# Altium PCB PCB_3U_Tester.PCBDOC (part 1 of 2)
Units mm, origin at the board's own origin, x right, y up, seen from the top; angles counter-clockwise.
Board outline 63.4 x 100 mm, 4 copper layers (Top, MP(GND), L3, Bot), stack 0.905 mm thick; 74 components, 58 nets, 355 pads, 142 vias.
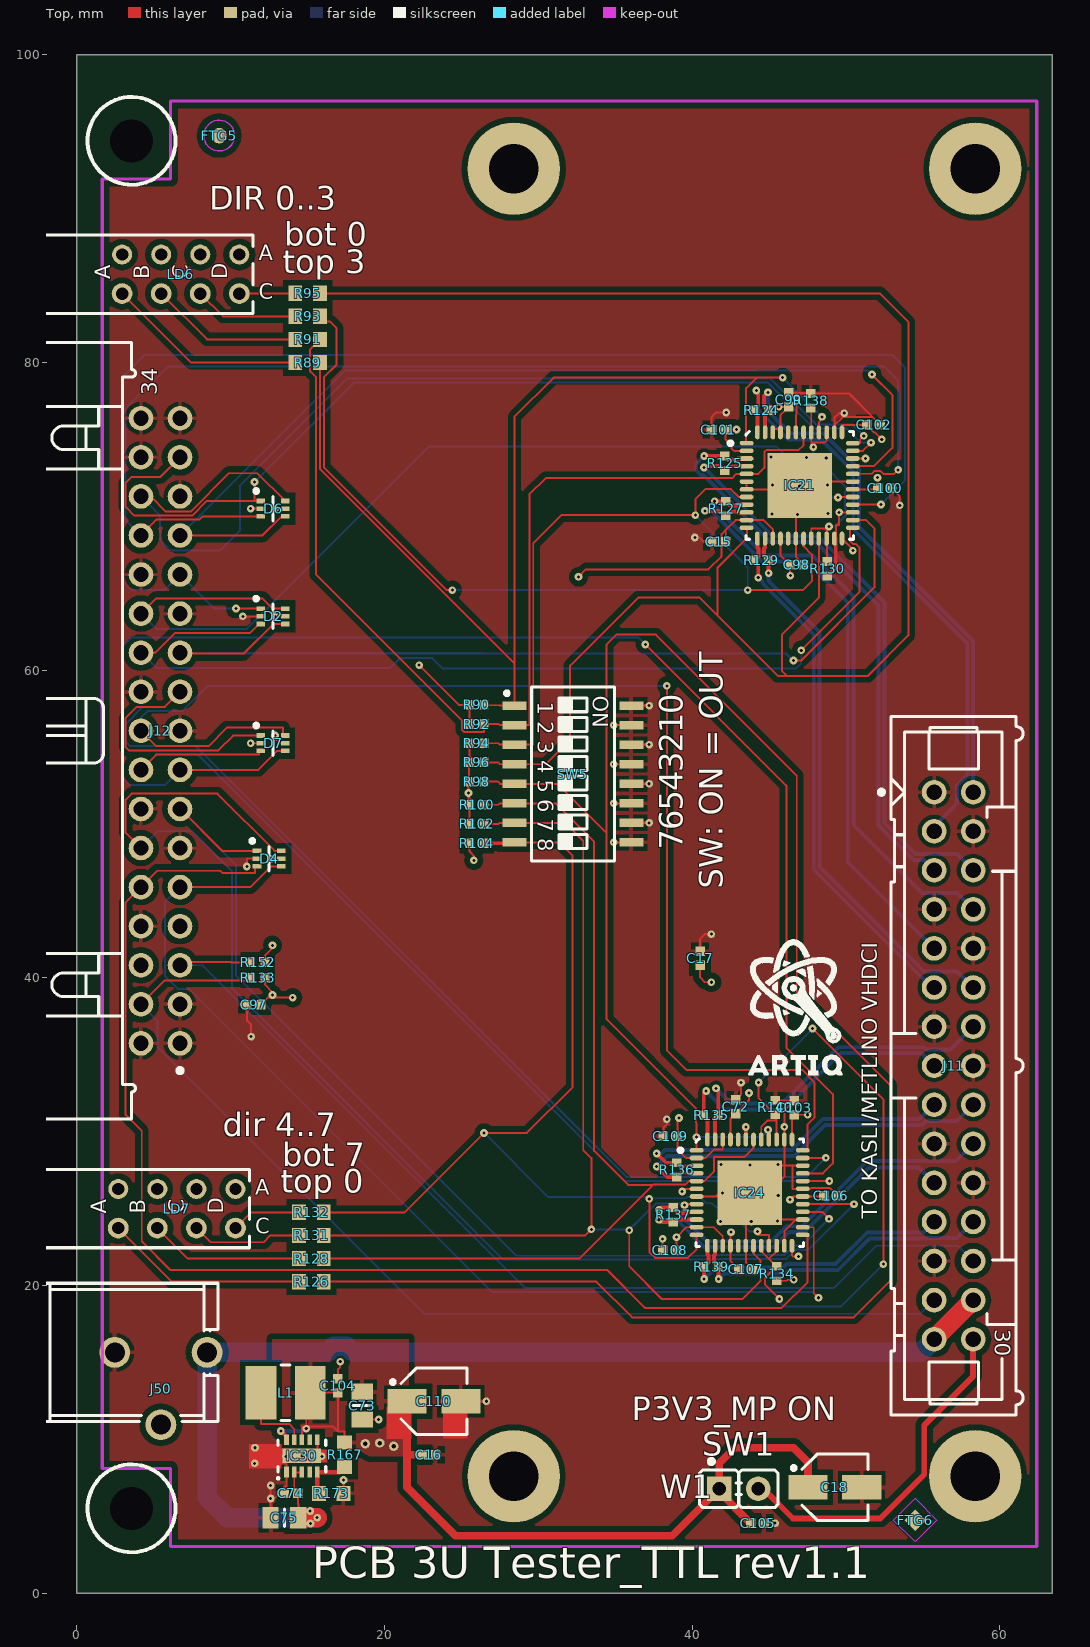
[diagram p0: Top view]
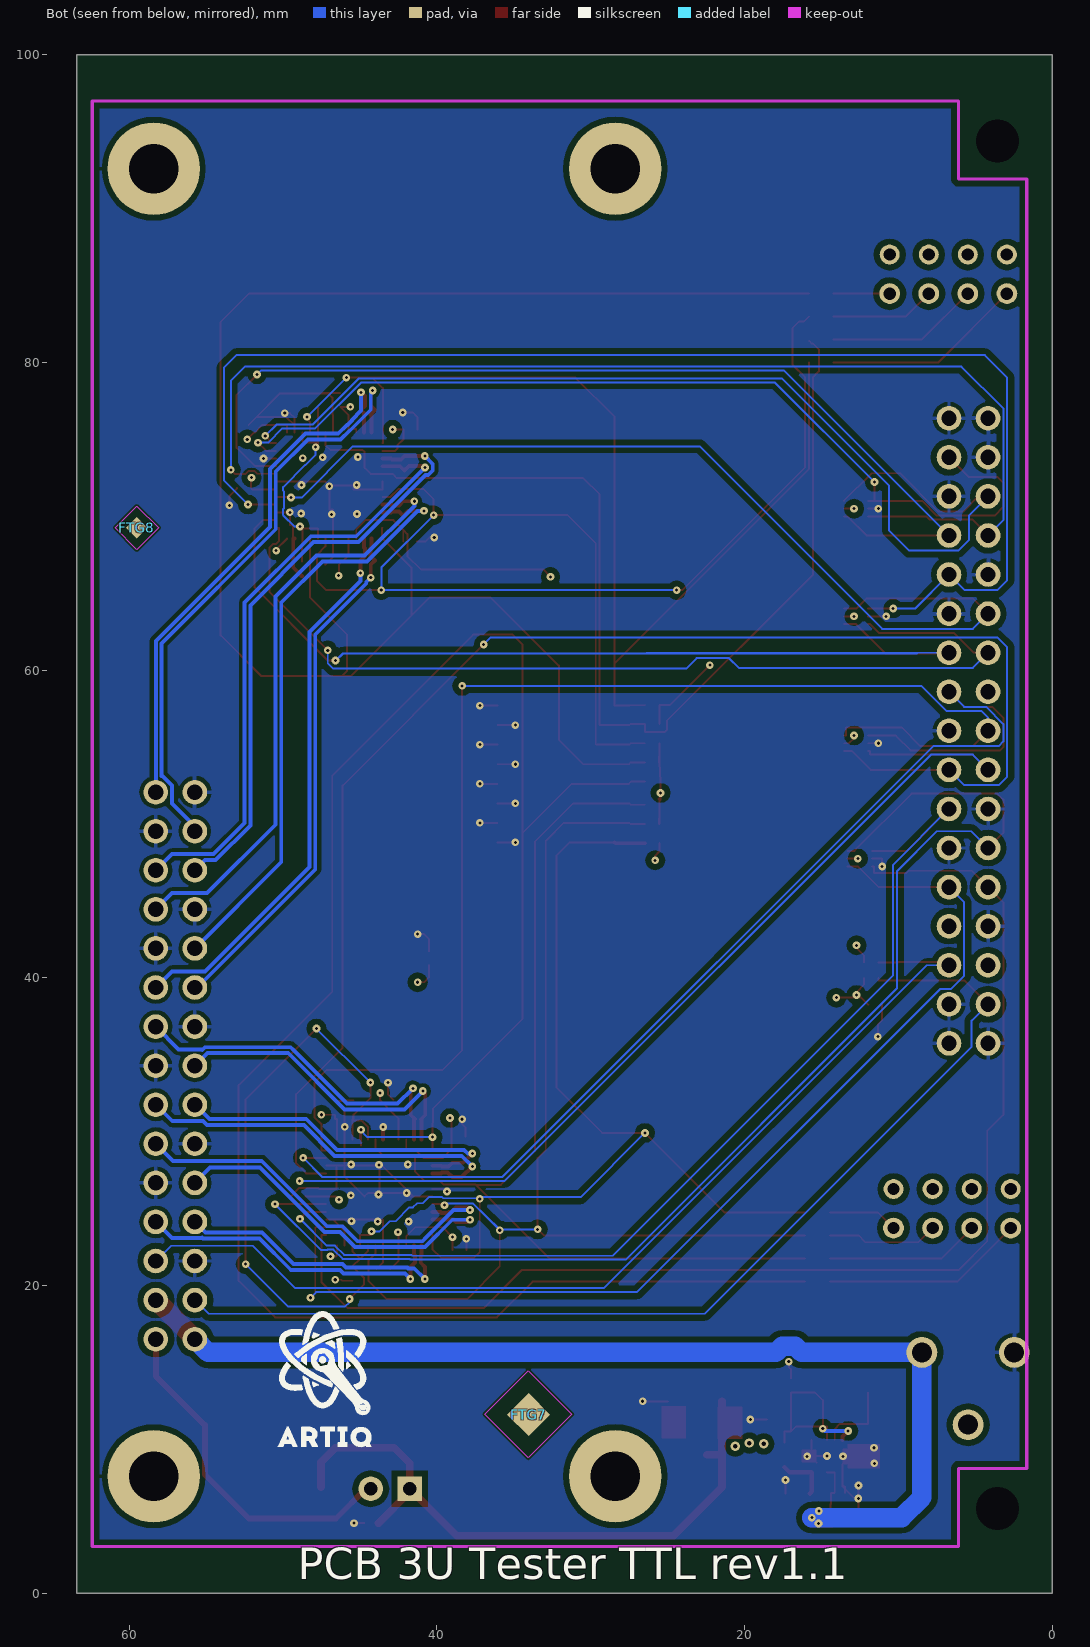
[diagram p1: Bot view, seen from below]
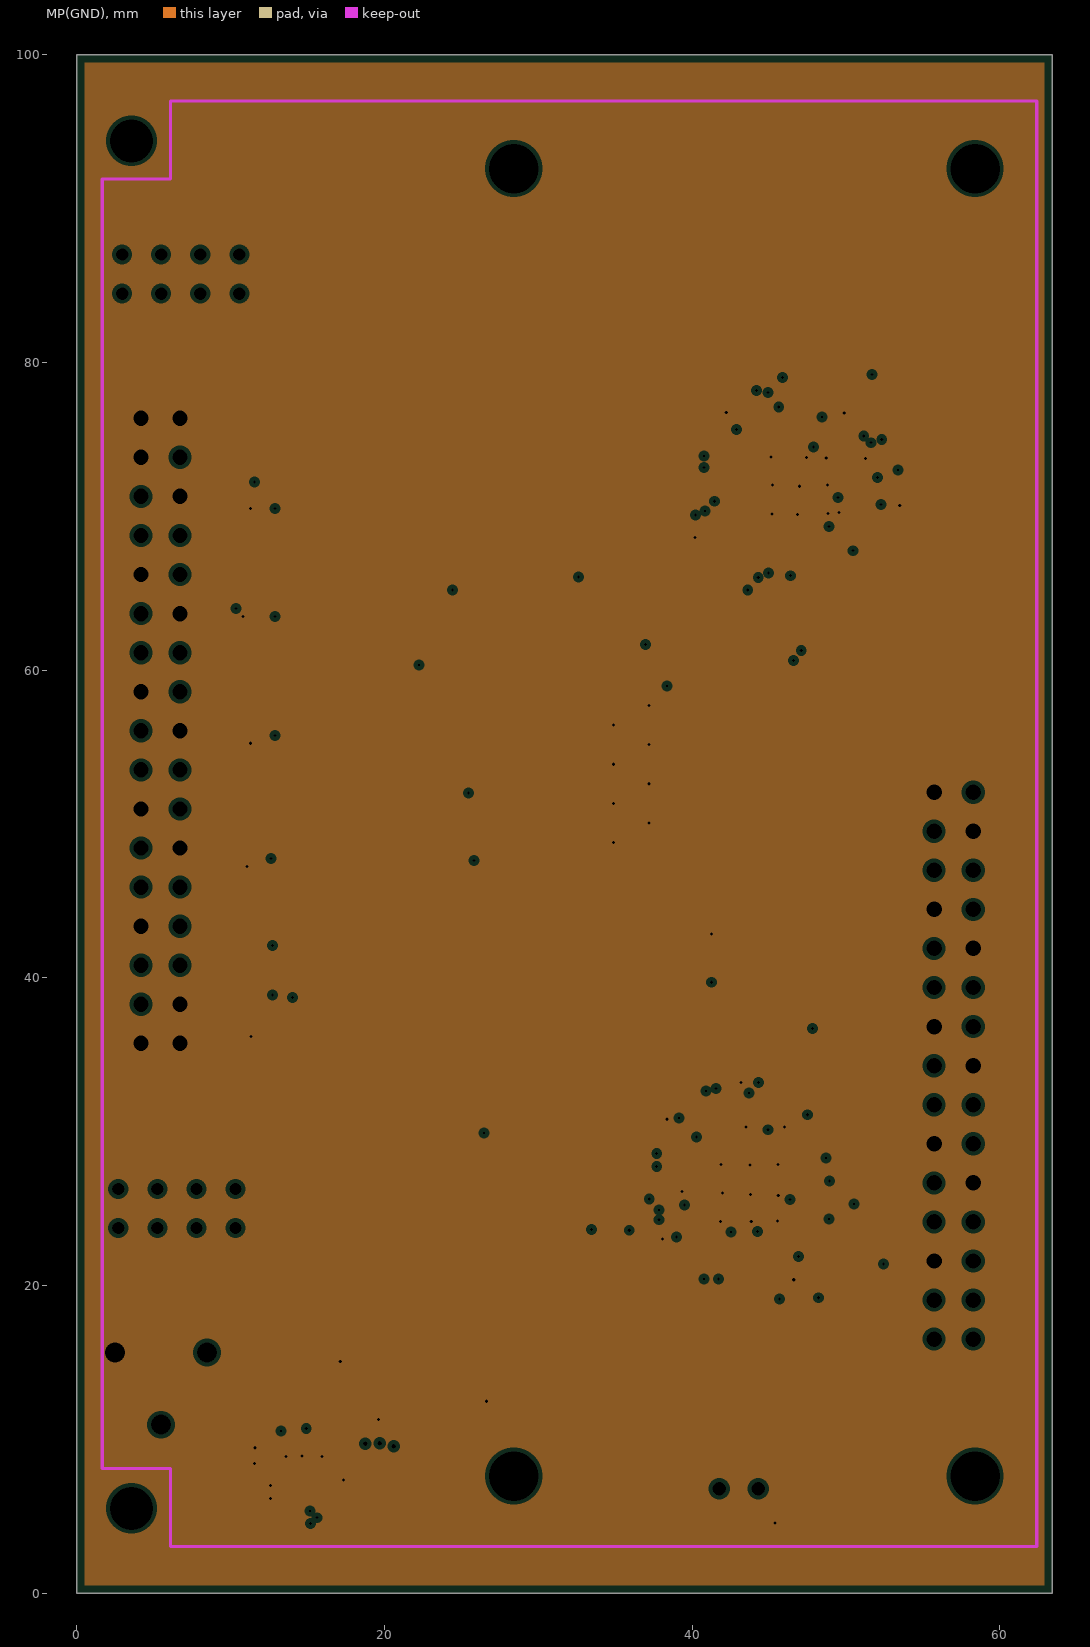
[diagram p2: MP(GND), clearances drawn from the general rule]
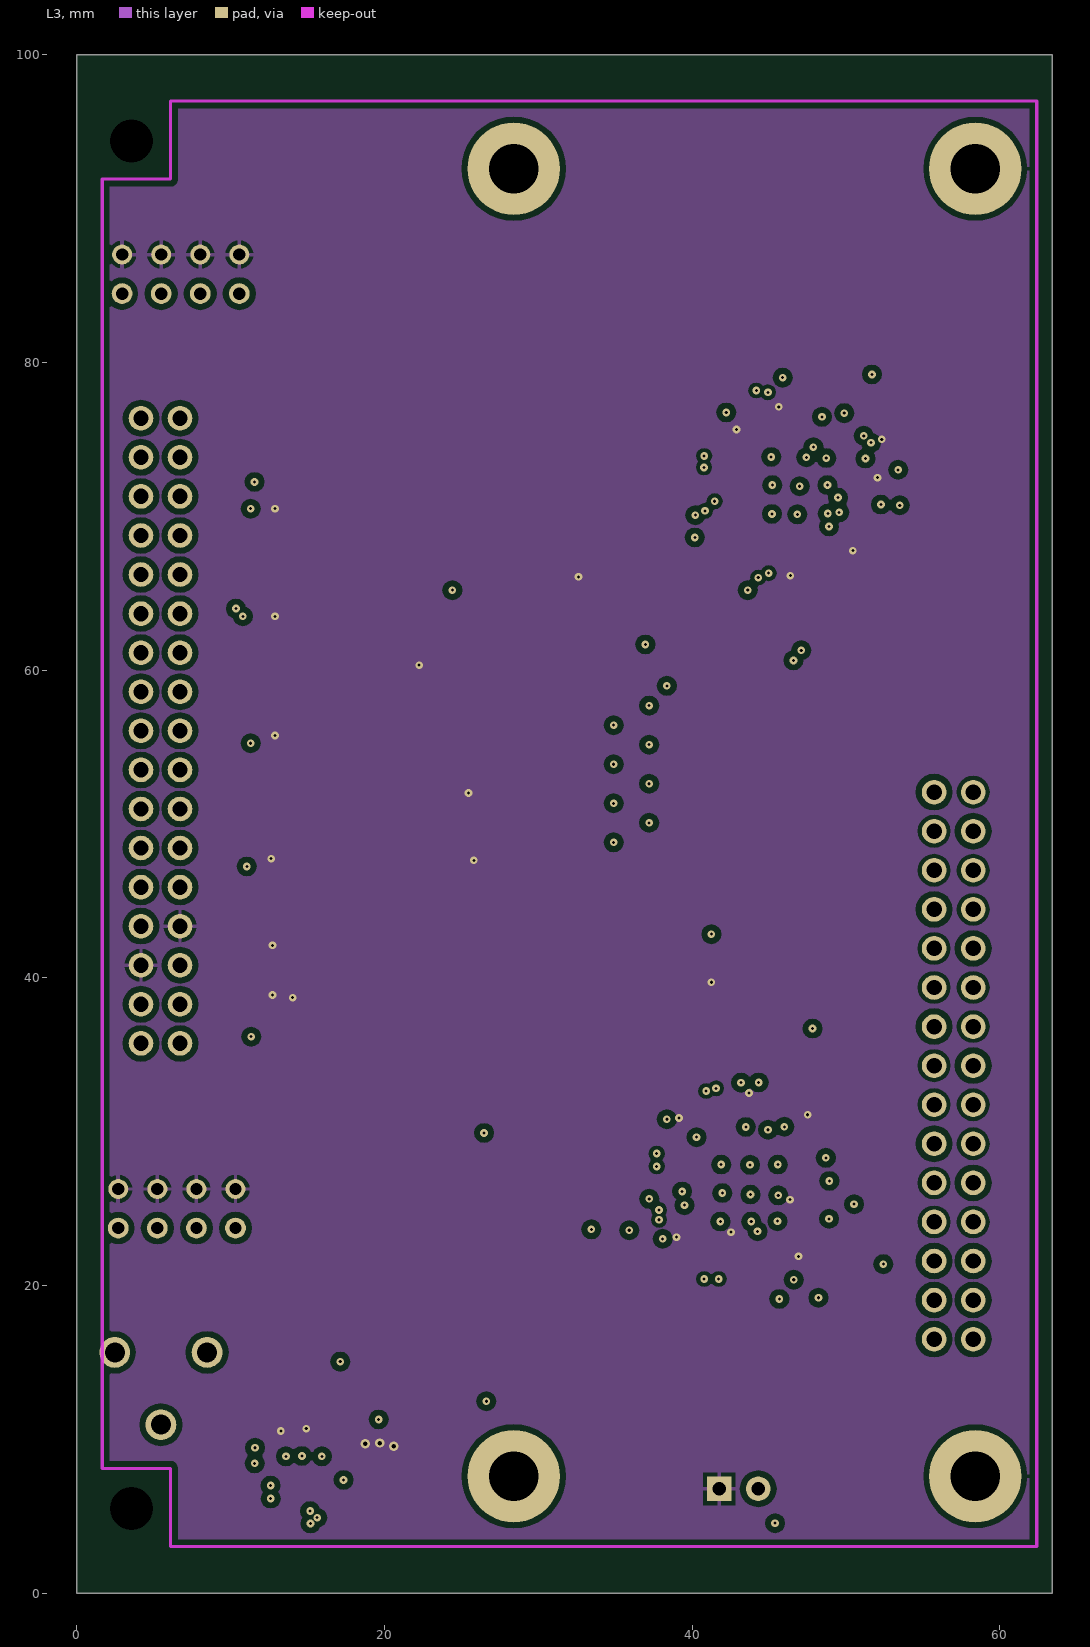
[diagram p3: L3]
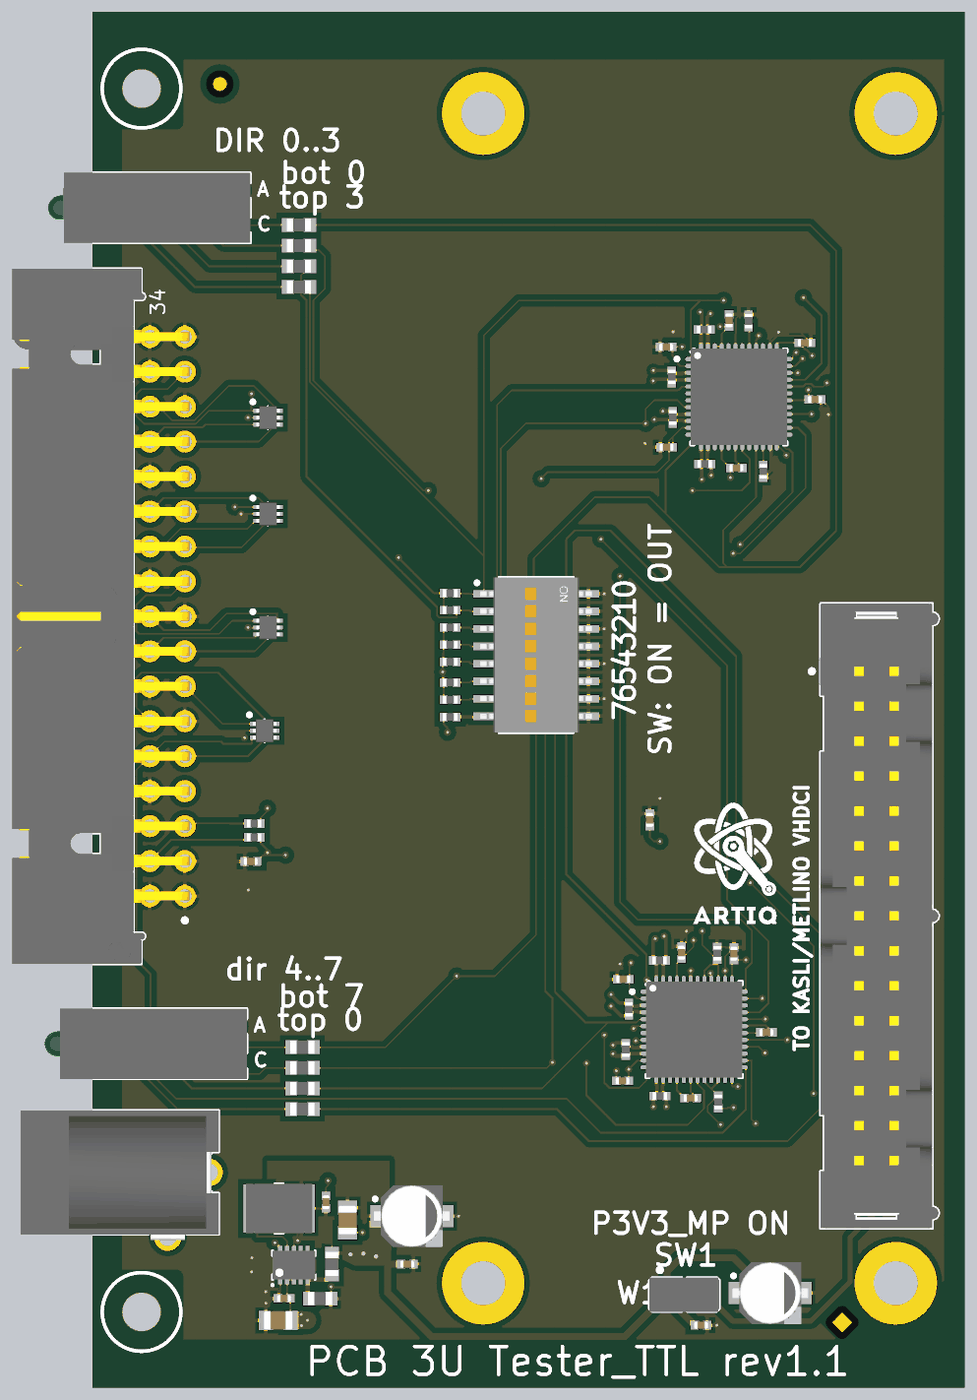
[diagram p5: 3D render of the assembled board from above, using the file's embedded part models]

## Layer stack, top to bottom
TopSolder: solder mask 0.0102, Solder Resist, Dk 3.5
Top: signal copper 0.0356
Dielectric1: core 0.381, FR-4, Dk 4.8
MP(GND): plane copper 0.036, net GND
Dielectric 3: core 0.254, Dk 4.2
L3: signal copper 0.036
Dielectric 4: prepreg 0.127, Dk 4.2
Bot: signal copper 0.0356
BottomSolder: solder mask 0.0102, Solder Resist, Dk 3.5

## Board outline
0,0 63.4,0 63.4,100 0,100

## Design rules (kind name [scope] priority, off if disabled: settings)
Clearance Clearance_DIFF [(InDifferentialPairClass('All Differential Pairs'))] p1: gap=0.127 ignorepadtopadclearanceinfootprint=FALSE except(0: Arc-Hole Track-Hole SMDPad-Hole THPad-Hole Via-Hole Fill-Hole Poly-Hole Region-Hole Text-Hole; 0.254: Arc-Poly Track-Poly SMDPad-Poly THPad-Poly Via-Poly Fill-Poly Poly-Poly Poly-Region Poly-Text)
Clearance [All] p2: gap=0.127 ignorepadtopadclearanceinfootprint=FALSE except(0: Arc-Hole Track-Hole SMDPad-Hole THPad-Hole Via-Hole Fill-Hole Poly-Hole Region-Hole Text-Hole; 0.381: Arc-Poly Track-Poly SMDPad-Poly THPad-Poly Via-Poly Fill-Poly Poly-Poly)
DiffPairsRouting [All] p1: maxlimit=0.254 minlimit=0.127 mostfreqgap=0.127 toplayer_minwidth=0.127 toplayer_maxwidth=0.381 toplayer_prefwidth=0.254 midlayer1_minwidth=0.127 midlayer1_maxwidth=0.381 midlayer1_prefwidth=0.254 bottomlayer_minwidth=0.127 bottomlayer_maxwidth=0.381 bottomlayer_prefwidth=0.254 maxuncoupledlength=12.7
FabricationTestPointUsage TestPointUsage [All] p1: valid=0 allowmultiple=FALSE
FabricationTestpoint Testpoint [All] p1: side=3 testpointundercomponent=TRUE minsize=1.016 maxsize=2.54 preferedsize=1.524 minholesize=0.508 maxholesize=1.016 preferedholesize=0.813 testpointgrid=0.025 allowsidetop=TRUE allowsidebottom=TRUE usegrid=TRUE gridtolerance=0
HoleSize [All] p1: absolutevalues=TRUE maxlimit=3.81 minlimit=0.025 maxpercent=80.000 minpercent=20.000
HoleToHoleClearance [All] p1: gap=0.025 allowstackedmicrovias=TRUE
MinimumSolderMaskSliver [All] p1: minsoldermaskwidth=0
PlaneClearance [All] p1: clearance=0.254
PlaneConnect [All] p1: planeconnectstyle=Direct reliefexpansion=0.508 reliefentries=4 reliefconductorwidth=0.254 reliefairgap=0.254
PolygonConnect PolygonConnect_pad [(InPadClass('All Pads'))] p1: connectstyle=Relief reliefconductorwidth=0.254 reliefentries=4 polygonreliefangle="90 Angle" airgapwidth=0.254
PolygonConnect [All] p2: connectstyle=Direct reliefconductorwidth=0.254 reliefentries=4 polygonreliefangle="45 Angle" airgapwidth=0.254
RoomDefinition PCB_3U_Tester [InComponentClass('PCB_3U_Tester')] p1: confinementstyle=ConfineIn formatcopy=TRUE lockcomponents=FALSE outline -24.384,-2.286 63.805,-2.286 63.805,101.651 -24.384,101.651
RoutingVias [All] p1: holewidth=0.2 width=0.5 viastyle="Through Hole" minholewidth=0.2 minwidth=0.5 maxholewidth=0.711 maxwidth=1.27
SilkToSilkClearance [All] p1: silktosilkclearance=0
SilkToSolderMaskClearance SilkscreenOverComponentPads [IsPad] p1: minsilkscreentomaskgap=0 clearancetoexposedcopper=TRUE
SolderMaskExpansion [All] p1: expansion=0.051
Width [All] p1: maxlimit=1.27 minlimit=0.127 preferedwidth=0.127
20 further rules are at their usual default settings.

## Classes and differential pairs
differential pair LVDS1: +LVDS1_P -LVDS1_N
differential pair LVDS2: +LVDS2_P -LVDS2_N
differential pair LVDS3: +LVDS3_P -LVDS3_N
differential pair LVDS4: +LVDS4_P -LVDS4_N
differential pair LVDS5: +LVDS5_P -LVDS5_N
differential pair LVDS6: +LVDS6_P -LVDS6_N
differential pair LVDS7: +LVDS7_P -LVDS7_N
differential pair LVDS8: +LVDS8_P -LVDS8_N

## Components (designator, comment, footprint, x,y, rotation, side; value= is the part's Value field where it differs from the comment)
C15 "100nF" CAPC1005X55N 41.732,68.351 r0 top
C16 "100nF" CAPC1005X55N 22.885,8.992 r180 top
C17 "100nF" CAPC1005X55N 40.513,41.275 r270 top
C18 "10uF" CAPAE430X540N 49.276,6.883 r0 top
C72 "100nF" CAPC1005X55N 42.824,31.623 r270 top
C73 "22uF" CAPC2012X135N 18.542,12.192 r90 top
C74 "100nF" CAPC1005X55N 13.919,6.502 r0 top
C75 "22uF" CAPC2012X135N 13.493,4.902 r0 top
C97 "100nF" CAPC1005X55N 11.5,38.25 r0 top
C98 "100nF" CAPC1005X55N 46.812,66.853 r180 top
C99 "100nF" CAPC1005X55N 46.279,77.572 r270 top
C100 "100nF" CAPC1005X55N 52.527,71.831 r180 top
C101 "100nF" CAPC1005X55N 41.707,75.641 r0 top
C102 "100nF" CAPC1005X55N 51.791,75.946 r180 top
C103 "100nF" CAPC1005X55N 46.634,31.547 r270 top
C104 "100nF" CAPC1005X55N 16.967,13.487 r270 top
C105 "100nF" CAPC1005X55N 44.247,4.547 r180 top
C106 "100nF" CAPC1005X55N 48.997,25.832 r180 top
C107 "100nF" CAPC1005X55N 43.485,21.057 r180 top
C108 "100nF" CAPC1005X55N 38.532,22.301 r0 top
C109 "100nF" CAPC1005X55N 38.583,29.693 r0 top
C110 "10uF" CAPAE430X540N 23.216,12.471 r0 top
D2 "NUP4114UPXV6T1G" SOTFL50P160X60-6N 12.75,63.5 r0 top
D4 "NUP4114UPXV6T1G" SOTFL50P160X60-6N 12.5,47.75 r0 top
D6 "NUP4114UPXV6T1G" SOTFL50P160X60-6N 12.75,70.5 r0 top
D7 "NUP4114UPXV6T1G" SOTFL50P160X60-6N 12.75,55.25 r0 top
FTG5 "Use only in PCB" FIDUCIAL_TOP_C100-200 9.25,94.75 r90 top
FTG6 "Use only in PCB" FIDUCIAL_TOP_S100-200 54.5,4.75 r90 top
FTG7 "Use only in PCB" FIDUCIAL_TOP_S200-400 34.036,11.608 r180 bottom
FTG8 "Use only in PCB" FIDUCIAL_TOP_S100-200 59.5,69.25 r90 bottom
IC21 "SN65MLVD040RGZT" QFN50P700X700X100-49N-S420 46.99,72.009 r0 top
IC24 "SN65MLVD040RGZT" QFN50P700X700X100-49N-S420 43.739,26.035 r0 top
IC30 "TPS62175DQC" SON50P200X300X80-11N-R94X250 14.63,8.915 r90 top
J11 "Familly" 3M_N2530-6002RB 56.998,34.29 r270 top locked
J12 "Header 34" 3M_N2534-5002RB 5.436,56.058 r90 top locked
J50 "Jack" CUI_PJ-102BH 2.464,15.646 r270 top locked
L1 "10uH" IND_MURATA-PS_8400 13.564,13.03 r0 top
LD6 "Green" LED_BIVAR_H485CGDL 6.75,85.75 r0 top locked
LD7 "Green" LED_BIVAR_H485CGDL 6.5,25 r0 top locked
R89 "220" RESC1608X55N 15,80 r0 top
R90 "10k" RESC1005X40N 26,57.75 r180 top
R91 "220" RESC1608X55N 15,81.5 r0 top
R92 "10k" RESC1005X40N 26,56.5 r180 top
R93 "220" RESC1608X55N 15,83 r0 top
R94 "10k" RESC1005X40N 26,55.25 r180 top
R95 "220" RESC1608X55N 15,84.5 r0 top
R96 "10k" RESC1005X40N 26,54 r180 top
R98 "10k" RESC1005X40N 26,52.75 r180 top
R100 "10k" RESC1005X40N 26,51.25 r180 top
R102 "10k" RESC1005X40N 26,50 r180 top
R104 "10k" RESC1005X40N 26,48.75 r180 top
R124 "100" RESC1005X40N 44.475,76.911 r180 top
R125 "100" RESC1005X40N 42.113,73.457 r270 top
R126 "220" RESC1608X55N 15.25,20.25 r0 top
R127 "100" RESC1005X40N 42.189,70.51 r270 top
R128 "220" RESC1608X55N 15.25,21.75 r0 top
R129 "100" RESC1005X40N 44.501,67.132 r0 top
R130 "10k" RESC1005X40N 48.768,66.599 r270 top
R131 "220" RESC1608X55N 15.25,23.25 r0 top
R132 "220" RESC1608X55N 15.25,24.75 r0 top
R133 "10k" RESC1005X40N 11.75,40 r180 top
R134 "100" RESC1005X40N 45.491,20.777 r270 top
R135 "100" RESC1005X40N 41.224,31.064 r180 top
R136 "100" RESC1005X40N 38.989,27.508 r270 top
R137 "100" RESC1005X40N 38.76,24.587 r270 top
R138 "100" RESC1005X40N 47.701,77.521 r90 top
R139 "100" RESC1005X40N 41.25,21.209 r0 top
R140 "10k" RESC1005X40N 45.415,31.572 r90 top
R152 "10k" RESC1005X40N 11.75,41 r180 top
R167 "270k" RESC1608X55N 17.399,8.992 r90 top
R173 "82k" RESC1608X55N 16.535,6.477 r180 top
SW1 "Jumper Type1" JUMPER_BLACK_INSULATED_2.54MM 41.758,6.782 r0 top
SW5 "Switch" SW_TYCO_1-1571983-0 32.25,53.25 r0 top
W1 "Test Point" COMATEL_385.0358.1.02.400 41.758,6.782 r0 top

## Footprints (in the part's own frame and the unit in brackets; to place one, negate y for a bottom-side part, rotate by r counter-clockwise, add the part's x,y. Pads: shape width x height; smd on the part's side, far side on the other; paste and mask are expansions set on the pad)
3M_N2530-6002RB [mm] "30 Contacts - Straight .100\" x .100\" Low Profile Four-Wall Header"
  round 1.6 hole 1: 1(-17.78,-1.27) 2(-17.78,1.27) 3(-15.24,-1.27) 4(-15.24,1.27) 5(-12.7,-1.27) 6(-12.7,1.27) 7(-10.16,-1.27) 8(-10.16,1.27) 9(-7.62,-1.27) 10(-7.62,1.27) 11(-5.08,-1.27) 12(-5.08,1.27) 13(-2.54,-1.27) 14(-2.54,1.27) 15(0,-1.27) 16(0,1.27) 17(2.54,-1.27) 18(2.54,1.27) 19(5.08,-1.27) 20(5.08,1.27) 21(7.62,-1.27) 22(7.62,1.27) 23(10.16,-1.27) 24(10.16,1.27) 25(12.7,-1.27) 26(12.7,1.27) 27(15.24,-1.27) 28(15.24,1.27) 29(17.78,-1.27) 30(17.78,1.27)
  silkscreen extent -22.71,-4.85 22.71,4.52, body extent -22.71,-4.11 22.71,4.52, height 9.91
3M_N2534-5002RB [mm] "34 Contacts - Right Angle .100\" x .100\" Low Profile Four-Wall Header"
  round 1.6 hole 1: 1(-20.32,-1.27) 2(-20.32,1.27) 3(-17.78,-1.27) 4(-17.78,1.27) 5(-15.24,-1.27) 6(-15.24,1.27) 7(-12.7,-1.27) 8(-12.7,1.27) 9(-10.16,-1.27) 10(-10.16,1.27) 11(-7.62,-1.27) 12(-7.62,1.27) 13(-5.08,-1.27) 14(-5.08,1.27) 15(-2.54,-1.27) 16(-2.54,1.27) 17(0,-1.27) 18(0,1.27) 19(2.54,-1.27) 20(2.54,1.27) 21(5.08,-1.27) 22(5.08,1.27) 23(7.62,-1.27) 24(7.62,1.27) 25(10.16,-1.27) 26(10.16,1.27) 27(12.7,-1.27) 28(12.7,1.27) 29(15.24,-1.27) 30(15.24,1.27) 31(17.78,-1.27) 32(17.78,1.27) 33(20.32,-1.27) 34(20.32,1.27)
  silkscreen extent -25.24,-1.42 25.25,11.28, body extent -25.24,-1.59 25.25,11.27, height 8.64
CAPAE430X540N [mm] "Capacitor, Aluminium Electrolytric, 4.3mm L X 4.3mm W X 5.4mm H, IPC Medium Density"
  rect 2.55x1.6 smd: 1(-1.75,0) 2(1.75,0)
  silkscreen extent -2.8,-2.15 2.15,2.15, body extent -2.75,-2.25 2.75,2.25, height 5.7
CAPC1005X55N [mm] "Chip Capacitor, Body 1.0x0.55mm, IPC Medium Density"
  rect 0.62x0.62 smd: 1(-0.45,0) 2(0.45,0)
  body extent -0.52,-0.27 0.53,0.28, height 0.55
CAPC2012X135N [mm] "Chip Capacitor, Body 2.0x1.25mm, IPC Medium Density"
  rect 1.05x1.4 smd: 1(-0.9,0) 2(0.9,0)
  silkscreen extent 0,-0.58 0,0.58, body extent -1.05,-0.67 1.05,0.68, height 1.25
COMATEL_385.0358.1.02.400 [mm] "2 Contacts Straight Strip Header Pitch 2.54mm L=6.3mm ''Mini-Wire-Wrap''"
  rect 1.6x1.6 hole 0.9: 1(0,0)
  round 1.6 hole 0.9: 2(2.54,0)
  silkscreen extent -1.27,-1.23 3.81,1.93, body extent -1.27,-1.22 3.81,1.23, height 8
CUI_PJ-102BH [mm] "2.5 mm Center Pin, 5A, 24V Right Angle, Through Hole, Tapered Pins, DC Power Jack Connector"
  round 2 hole 1.3: 1(0,6) 2(0,0) 3(4.7,3)
  silkscreen extent -4.5,-7.7 4.5,6.7, body extent -4.5,-7.7 4.9,6.7, height 11
FIDUCIAL_TOP_C100-200 [mm] "Round Fiducial Target, Top Layer, 1.0mm, Top Solder 2.0mm, Keepout =2.0mm"
  round 1 smd paste-0.51 mask+0.5: FTG2(0,0)
  Top keep-out circle w0.1: c0,0 r1
FIDUCIAL_TOP_S100-200 [mm] "Square Fiducial Target, Top Layer, 1.0mm, Top Solder 2.0mm, Keepout =2.0mm"
  rect 1x1 smd rot 45 paste-0.51 mask+0.5: 1(0,0)
  Top keep-out region: 1.414,0 0,-1.414 -1.414,0 0,1.414
FIDUCIAL_TOP_S200-400 [mm] "Square Fiducial Target, Top Layer, 2.0mm, Top Solder 4.0mm, Keepout =4.0mm"
  rect 2x2 smd rot 45 paste-0.9 mask+1: 1(0,0)
  Top keep-out region: -2.839,0.011 -0.011,2.839 2.818,0.011 -0.011,-2.818
IND_MURATA-PS_8400 [mm] "Miniature Surface Mount Power Inductors, 4.5mm L X 3.3mm W X 2.9mm H, MURATA 8400 Serie"
  rect 2x3.5 smd: 1(-1.6,0) 2(1.6,0)
  silkscreen extent -0.3,-1.8 0.3,1.8, body extent -2.4,-1.8 2.4,1.8, height 2.9
JUMPER_BLACK_INSULATED_2.54MM [mm] "Black Insulated Jumper Pitch 2.54mm W=2.5mm L=5mm H=6.5mm"
  round 0.9 smd paste-0.46 mask-0.46: 1(0,0)
  silkscreen extent 1.1,-0.38 1.44,0.38, body extent -1.27,-1.27 3.73,1.23, height 8.2
LED_BIVAR_H485CGDL [mm] "Quad-Level 2mm Green, PCB Edge Mounting  BIVAR H485CGDL"
  round 1.35 hole 0.8: 1(-3.81,-1.27) 3(-1.27,-1.27) 5(1.27,-1.27) 7(3.81,-1.27)
  round 1.3 hole 0.8: 2(-3.81,1.27) 4(-1.27,1.27) 6(1.27,1.27) 8(3.81,1.27)
  silkscreen extent -9.99,-2.55 4.71,2.55, body extent -9.99,-2.55 4.71,2.55, height 11.3
QFN50P700X700X100-49N-S420 [mm] "QFN, 0.50mm Pitch, Square; 48 Pin, 7.00mm L X 7.00mm W X 1mm H body (W/Thermal Tab 4.2mm X 4.2mm), IPC Medium Density"
  oval 0.9x0.3 smd: 1(-3.45,2.75) 2(-3.45,2.25) 3(-3.45,1.75) 4(-3.45,1.25) 5(-3.45,0.75) 6(-3.45,0.25) 7(-3.45,-0.25) 8(-3.45,-0.75) 9(-3.45,-1.25) 10(-3.45,-1.75) 11(-3.45,-2.25) 12(-3.45,-2.75) 25(3.45,-2.75) 26(3.45,-2.25) 27(3.45,-1.75) 28(3.45,-1.25) 29(3.45,-0.75) 30(3.45,-0.25) 31(3.45,0.25) 32(3.45,0.75) 33(3.45,1.25) 34(3.45,1.75) 35(3.45,2.25) 36(3.45,2.75)
  oval 0.3x0.9 smd: 13(-2.75,-3.45) 14(-2.25,-3.45) 15(-1.75,-3.45) 16(-1.25,-3.45) 17(-0.75,-3.45) 18(-0.25,-3.45) 19(0.25,-3.45) 20(0.75,-3.45) 21(1.25,-3.45) 22(1.75,-3.45) 23(2.25,-3.45) 24(2.75,-3.45) 37(2.75,3.45) 38(2.25,3.45) 39(1.75,3.45) 40(1.25,3.45) 41(0.75,3.45) 42(0.25,3.45) 43(-0.25,3.45) 44(-0.75,3.45) 45(-1.25,3.45) 46(-1.75,3.45) 47(-2.25,3.45) 48(-2.75,3.45)
  rect 4.2x4.2 smd: 49(0,0)
  silkscreen extent -4.62,-3.5 3.5,3.5, body extent -3.5,-3.5 3.5,3.5, height 1
RESC1005X40N [mm] "Chip Resistor, EIA 0402, Metric 1005, Body 1.0x0.5mm, IPC Medium Density"
  rect 0.58x0.62 smd: 1(-0.47,0) 2(0.47,0)
  body extent -0.52,-0.27 0.53,0.28, height 0.4
RESC1608X55N [mm] "Chip Resistor, EIA 0603, Metric 1608, Body 1.6x0.8mm, IPC Medium Density"
  rect 0.9x1 smd: 1(-0.8,0) 2(0.8,0)
  body extent -0.87,-0.47 0.88,0.48, height 0.55
SON50P200X300X80-11N-R94X250 [mm] "SON, 10-Leads, Body 2x3mm, Pitch 0.5mm, Thermal Pad 0.94x2.5mm, IPC Medium Density"
  rect 0.7x0.3 smd: 1(-1.05,1) 2(-1.05,0.5) 3(-1.05,0) 4(-1.05,-0.5) 5(-1.05,-1) 6(1.05,-1) 7(1.05,-0.5) 8(1.05,0) 9(1.05,0.5) 10(1.05,1)
  rect 0.94x2.5 smd: 11(0,0)
  silkscreen extent -1.5,-1.55 1.05,1.6, body extent -1.05,-1.55 1.05,1.55, height 0.8
SOTFL50P160X60-6N [mm] "SOTFL (SOT666), 0.50mm, Pitch; 6 Pin, 1.20mm W X 1.60mm L X 0.60mm H Body, IPC Medium Density"
  rect 0.57x0.3 smd: 1(-0.79,0.5) 2(-0.79,0) 3(-0.79,-0.5) 4(0.79,-0.5) 5(0.79,0) 6(0.79,0.5)
  silkscreen extent -1.22,-0.8 0,1.27, body extent -0.85,-0.85 0.85,0.85, height 0.6
SW_TYCO_1-1571983-0 [mm] "Pitch 1.27mm,  Body 11.28x6.2mm, 8 Ways SPST Surface-Mount DIP Switch, TYCO GDH Serie"
  rect 1.55x0.55 smd: 1(-3.8,4.445) 2(-3.8,3.175) 3(-3.8,1.905) 4(-3.8,0.635) 5(-3.8,-0.635) 6(-3.8,-1.905) 7(-3.8,-3.175) 8(-3.8,-4.445) 9(3.8,-4.445) 10(3.8,-3.175) 11(3.8,-1.905) 12(3.8,-0.635) 13(3.8,0.635) 14(3.8,1.905) 15(3.8,3.175) 16(3.8,4.445)
  silkscreen extent -4.42,-5.65 2.7,5.65, body extent -4.06,-5.64 4.06,5.64, height 2.36

## Part data
C15 C16 C17 C72 C74 C97 C98 C99 C100 C101 C102 C103 C104 C105 C106 C107 C108 C109: library part CC0402_100NF_16V_10%_X5R, "Non-polarised capacitor", Case=0402, Manufacturer=GENERIC, Manufacturer1 ComponentHeight=0.55mm, Manufacturer1 Example=MURATA, Manufacturer1 Part Number=GRM155R61C104KA88D, Tolerance=±10%, Voltage=16V, Author="CERN DEM JLC", Component Type=Standard, CreateDate=10.12.2013, HelpURL=\\cern.ch\dfs\Applications\Altium\Datasheets\CC0402_X5R_MURATA_GRM.pdf, LatestRevisionDate=10.12.2013, Manufacturer Part Number=CC0402_100NF_16V_10%_X5R, Mounted=Yes, Part Description="SMD Multilayer Chip Ceramic Capacitor", Part Number=CC0402_100NF_16V_10%_X5R, Pin Count=2, Sense=No, SMD=Yes, Socket=No, Status=None, TC=X5R
C18 C110: library part CAE430-540_10UF_16V_20%, "Polarised capacitor", Case=B, Manufacturer=PANASONIC, Manufacturer Part Number=EEEFK1C100AR, Tolerance=±20%, Voltage=16V, Author="CERN DEM JLC", ComponentHeight=5.8mm, Component Type=Standard, CreateDate=03.12.2007, HelpURL=\\cern.ch\dfs\Applications\Altium\Datasheets\CAE_PANASONIC_FK.pdf, LatestRevisionDate=05.11.2014, Mounted=Yes, Part Description="Aluminum Electrolytic SMT Capacitor", Part Number=CAE430-540_10UF_16V_20%, Pin Count=2, Sense=No, SMD=Yes, Socket=No, Status="Not Recommended"
C73 C75: library part CC0805_22UF_16V_10%_X5R, "Non-polarised capacitor", Case=0805, Manufacturer=GENERIC, Manufacturer1 ComponentHeight=1.35mm, Manufacturer1 Example=TDK, Manufacturer1 Part Number=C2012X5R1C226KT, Tolerance=±10%, Voltage=16V, Author="CERN DEM JLC", Component Type=Standard, CreateDate=25.10.2012, HelpURL=\\cern.ch\dfs\Applications\Altium\Datasheets\CC0805_X5R_TDK_C.pdf, LatestRevisionDate=25.10.2012, Manufacturer Part Number=CC0805_22UF_16V_10%_X5R, Mounted=Yes, Part Description="SMD Multilayer Chip Ceramic Capacitor", Part Number=CC0805_22UF_16V_10%_X5R, Pin Count=2, Sense=No, SMD=Yes, Socket=No, Status=Preferred, TC=X5R
D2 D4 D6 D7: Manufacturer="ON SEMICONDUCTOR", Voltage=5.5V, Author="CERN DEM JLC", Bonding=No, ComponentHeight=1.75mm, Component Type=Standard, CreateDate=05.12.2012, Device=NUP4114UPXV6T1G, HelpURL=\\cern.ch\dfs\Applications\Altium\Datasheets\NUP4114UPXV6T1G.pdf, LatestRevisionDate=05.12.2012, Manufacturer Part Number=NUP4114UPXV6T1G, Mounted=Yes, PackageDescription="SOTFL (SOT666, SOT563,), 0.50mm, Pitch; 6 Pin, 1.20mm W X 1.60mm L X 0.60mm H Body, IPC Medium Density", Part Description="ESD Protection Diodes Array (8kV) with Low Clamping Voltage", Part Number=NUP4114UPXV6T1G, Pin Count=8, PressFit=No, Sense=No, SMD=Yes, Socket=No
FTG5: library part FIDUCIAL_TARGET_C100-200, "Fiducial Target", Author="CERN DEM JLC", ComponentHeight=0mm, Component Type="Standard (No BOM)", CreateDate=09.02.2010, Family=Fiducial, HelpURL=Undefined, LatestRevisionDate=04.04.2012, Mounted=No, PackageDescription="Round Fiducial Target, Top Layer, 1.0mm, Top Solder 2.0mm, Keepout =2.0mm", Part Description="Round Fiducial Target, Top Layer, 1.0mm, Top Solder 2.0mm, Keepout =2.0mm", Part Number=FIDUCIAL_TARGET_C100-200, Pin Count=1, Sense=No, SMD=Yes, Socket=No, Status=None
FTG6 FTG8: library part FIDUCIAL_TARGET_S100-200, "Fiducial Target", Author="CERN DEM JLC", ComponentHeight=0mm, Component Type="Standard (No BOM)", CreateDate=09.02.2010, Family=Fiducial, HelpURL=Undefined, LatestRevisionDate=04.04.2012, Mounted=No, PackageDescription="Square Fiducial Target, Top Layer, 1.0mm, Top Solder 2.0mm, Keepout =2.0mm", Part Description="Square Fiducial Target, Top Layer, 1.0mm, Top Solder 2.0mm, Keepout =2.0mm", Part Number=FIDUCIAL_TARGET_S100-200, Pin Count=1, Sense=No, SMD=Yes, Socket=No, Status=None
FTG7: library part FIDUCIAL_TARGET_S200-400, "Fiducial Target", Author="CERN DEM JLC", ComponentHeight=0mm, Component Type="Standard (No BOM)", CreateDate=02.06.2008, Family=Fiducial, HelpURL=Undefined, LatestRevisionDate=04.04.2012, Mounted=No, PackageDescription="Square Fiducial Target, Top Layer, 2.0mm, Top Solder 4.0mm, Keepout =4.0mm", Part Description="Square Fiducial Target, Top Layer, 2.0mm, Top Solder 4.0mm, Keepout =4.0mm", Part Number=FIDUCIAL_TARGET_S200-400, Pin Count=1, Sense=No, SMD=Yes, Socket=No, Status=None
IC21 IC24: "4-Channel Half-Duplex M-LVDS Line Transceiver", Case=QFN48, Manufacturer="TEXAS INSTRUMENTS", Author="CERN DEM JLC", Bonding=No, ComponentHeight=1mm, Component Type=Standard, CreateDate=17.03.2011, Device=SN65MLVD040RGZT, HelpURL=\\cern.ch\dfs\Applications\Altium\Datasheets\SN65MLVD040RGZT.pdf, LatestRevisionDate=17.03.2011, Manufacturer Part Number=SN65MLVD040RGZT, Mounted=Yes, PackageDescription="QFN, 0.50mm Pitch, Square; 48 Pin, 7.00mm L X 7.00mm W X 1mm H body (W/Thermal Tab 4.2mm X 4.2mm), IPC Medium Density", Part Description="4-Channel Half-Duplex M-LVDS Line Transceiver", Part Number=SN65MLVD040RGZT, Pin Count=49, PressFit=No, Sense=No, SMD=Yes, Socket=No
IC30: "4.75-28VDC to 1-6VDC, 500mA Step-Down Converter With Sleep Mode", Case=SON10, Manufacturer="TEXAS INSTRUMENTS", Author="CERN DEM JMW", Bonding=No, ComponentHeight=0.8mm, Component Type=Standard, CreateDate=11.08.2015, Device=TPS62175DQC, HelpURL=\\cern.ch\dfs\Applications\Altium\Datasheets\TPS62175DQC.pdf, LatestRevisionDate=11.08.2015, Manufacturer Part Number=TPS62175DQC, Mounted=Yes, PackageDescription="SON, 10-Leads, Body 2x3mm, Pitch 0.5mm, Thermal Pad 0.94x2.5mm, IPC Medium Density", Part Description="4.75-28VDC to 1-6VDC, 500mA Step-Down Converter With Sleep Mode", Part Number=TPS62175DQC, Pin Count=11, PressFit=No, Sense=No, SMD=Yes, Socket=No
J11: library part 3M_N2530-6002RB, "Connector 30 Male", Manufacturer=3M, Manufacturer Part Number=N2530-6002RB, Author="CERN DEM JLC", ComponentHeight=10.03mm, Component Type=Standard, CreateDate=11.02.2009, Family="Header 30", HelpURL=\\cern.ch\dfs\Applications\Altium\Datasheets\3M_N2530-6002RB.pdf, LatestRevisionDate=11.08.2009, Mounted=Yes, Part Description="30 Contacts - Straight .100'' x .100'' Low Profile Four-Wall Header, 2500 Series", Part Number=3M_N2530-6002RB, Pin Count=30, PressFit=No, Sense=No, SMD=No, Socket=No, Status=None
J12: library part 3M_N2534-5002RB, "Connector 34 Male", Manufacturer=3M, Manufacturer Part Number=N2534-5002RB, Author="CERN DEM JLC", ComponentHeight=8.59mm, Component Type=Standard, CreateDate=29.10.2008, Family="Header 34", HelpURL=\\cern.ch\dfs\Applications\Altium\Datasheets\3M_N2534-5002RB.pdf, LatestRevisionDate=11.08.2009, Mounted=Yes, Part Description="34 Contacts - Right Angle .100\" x .100\" Low Profile Four-Wall Header, 2500 Series", Part Number=3M_N2534-5002RB, Pin Count=34, PressFit=No, Sense=No, SMD=No, Socket=No, Status=None
J50: library part CUI_PJ-102BH, "2.5 mm Center Pin, 5A, 24V Right Angle, Through Hole, Tapered Pins, DC Power Jack Connector", Manufacturer="CUI INC.", Manufacturer Part Number=PJ-102BH, Author="CERN DEM JLC", ComponentHeight=11mm, Component Type=Standard, CreateDate=14.08.2013, Family=Jack, HelpURL=\\cern.ch\dfs\Applications\Altium\Datasheets\CUI_PJ-102BH.pdf, LatestRevisionDate=14.08.2013, Mounted=Yes, Part Description="2.5 mm Center Pin, 5A, 24V, Right Angle, Through Hole, Tapered Pins, DC Power Jack Connector", Part Number=CUI_PJ-102BH, Pin Count=3, PressFit=No, Sense=No, SMD=No, Socket=No, Status=None
L1: library part IND_10UH_10%_MURATA-PS_8400, "Inductor With Core", Manufacturer="MURATA POWER SOLUTIONS", Manufacturer Part Number=84103C, Power=950mA, Resistance=0.24R, Tolerance=±10%, Author="CERN DEM JLC", ComponentHeight=2.9mm, Component Type=Standard, CreateDate=02.07.2012, HelpURL=\\cern.ch\dfs\Applications\Altium\Datasheets\IND_MURATA-PS_8400.pdf, LatestRevisionDate=02.07.2012, Mounted=Yes, Part Description="Miniature Surface Mount Power Inductor (8400 Serie)", Part Number=IND_10UH_10%_MURATA-PS_8400, Pin Count=2, Sense=No, SMD=Yes, Socket=No, Status=None
LD6 LD7: library part LED_BIVAR_H485CGDL, "LED x4 Green 1C2A-BOT_3C4A_5C6A_7C8A-TOP", Manufacturer=BIVAR, Manufacturer Part Number=H485CGDL, Author="CERN DEM JLC", Bonding=No, Color=Green, ComponentHeight=11.3mm, Component Type=Standard, CreateDate=04.06.2012, HelpURL=\\cern.ch\dfs\Applications\Altium\Datasheets\LED_BIVAR_H485CGDL.pdf, LatestRevisionDate=04.06.2012, Mounted=Yes, PackageDescription="Quad-Level 2mm Green, PCB Edge Mounting  BIVAR H485CHDL", Part Description="Quad-Level 2mm Green LED, PCB Edge Mounting", Part Number=LED_BIVAR_H485CGDL, Pin Count=8, PressFit=No, Sense=No, SMD=No, Socket=No
R89 R91 R93 R95 R126 R128 R131 R132: library part R0603_220R_1%_0.1W_100PPM, "Resistor - 1%", Case=0603, Manufacturer=GENERIC, Manufacturer1 ComponentHeight=0.55mm, Manufacturer1 Example="NIC COMPONENT", Manufacturer1 Part Number=NRC06F2200TRF, Power=0.1W, Tolerance=±1%, Author="CERN DEM JLC", Component Type=Standard, CreateDate=03.12.2007, HelpURL=\\cern.ch\dfs\Applications\Altium\Datasheets\R0603_NIC_NRC.pdf, LatestRevisionDate=13.03.2008, Manufacturer Part Number=R0603_220R_1%_0.1W_100PPM, Mounted=Yes, Part Description="General Purpose Thick Film Chip Resistor", Part Number=R0603_220R_1%_0.1W_100PPM, Pin Count=2, Sense=No, SMD=Yes, Socket=No, Status=Preferred, TC=±100ppm/°C
R90 R92 R94 R96 R98 R100 R102 R104 R130 R133 R140 R152: library part R0402_10K_1%_0.0625W_100PPM, "Resistor - 1%", Case=0402, Manufacturer=GENERIC, Manufacturer1 ComponentHeight=0.4mm, Manufacturer1 Example="YAGEO PHYCOMP", Manufacturer1 Part Number=232270671003L, Power=0.0625W, Tolerance=±1%, Author="CERN DEM JLC", Component Type=Standard, CreateDate=03.12.2007, HelpURL=\\cern.ch\dfs\Applications\Altium\Datasheets\R0402_Phycomp_RC0402.pdf, LatestRevisionDate=17.10.2012, Manufacturer Part Number=R0402_10K_1%_0.0625W_100PPM, Mounted=Yes, Part Description="General Purpose Thick Film Chip Resistor", Part Number=R0402_10K_1%_0.0625W_100PPM, Pin Count=2, Sense=No, SMD=Yes, Socket=No, Status="Not recommended", TC=±100ppm/°C
R124 R125 R127 R129 R134 R135 R136 R137 R138 R139: library part R0402_100R_1%_0.1W_100PPM, "Resistor - 1%", Case=0402, Manufacturer=GENERIC, Manufacturer1 ComponentHeight=0.4mm, Manufacturer1 Example=PANASONIC, Manufacturer1 Part Number=ERJ2RKF1000X, Manufacturer Part Number=R0402_100R_1%_0.1W_100PPM_50V, Power=0.1W, Tolerance=±1%, Voltage=50V, Author="CERN DEM JLC", Component Type=Standard, CreateDate=12.12.2013, HelpURL=\\cern.ch\dfs\Applications\Altium\Datasheets\R0402_PANASONIC_ERJ2RK.pdf, LatestRevisionDate=03.03.2015, Mounted=Yes, Part Description="General Purpose Thick Film Chip Resistor", Part Number=R0402_100R_1%_0.1W_100PPM, Pin Count=2, Sense=No, SMD=Yes, Socket=No, Status="Not recommended", TC=±100ppm/°C
R167: library part R0603_270K_1%_0.1W_100PPM, "Resistor - 1%", Case=0603, Manufacturer=GENERIC, Manufacturer1 ComponentHeight=0.55mm, Manufacturer1 Example="NIC COMPONENT", Manufacturer1 Part Number=NRC06F2703TRF, Power=0.1W, Tolerance=±1%, Author="CERN DEM JLC", Component Type=Standard, CreateDate=03.12.2007, HelpURL=\\cern.ch\dfs\Applications\Altium\Datasheets\R0603_NIC_NRC.pdf, LatestRevisionDate=13.03.2008, Manufacturer Part Number=R0603_270K_1%_0.1W_100PPM, Mounted=Yes, Part Description="General Purpose Thick Film Chip Resistor", Part Number=R0603_270K_1%_0.1W_100PPM, Pin Count=2, Sense=No, SMD=Yes, Socket=No, Status=Preferred, TC=±100ppm/°C
R173: library part R0603_82K_1%_0.1W_100PPM, "Resistor - 1%", Case=0603, Manufacturer=GENERIC, Manufacturer1 ComponentHeight=0.55mm, Manufacturer1 Example="NIC COMPONENT", Manufacturer1 Part Number=NRC06F8202TRF, Power=0.1W, Tolerance=±1%, Author="CERN DEM JLC", Component Type=Standard, CreateDate=03.12.2007, HelpURL=\\cern.ch\dfs\Applications\Altium\Datasheets\R0603_NIC_NRC.pdf, LatestRevisionDate=13.03.2008, Manufacturer Part Number=R0603_82K_1%_0.1W_100PPM, Mounted=Yes, Part Description="General Purpose Thick Film Chip Resistor", Part Number=R0603_82K_1%_0.1W_100PPM, Pin Count=2, Sense=No, SMD=Yes, Socket=No, Status=Preferred, TC=±100ppm/°C
SW1: library part COMATEL_313.1730.0.00.40.0, "Jumper 1 Pin", Manufacturer="KONTEK COMATEL", Manufacturer Part Number=313.1730.0.00.40.0, Author="CERN DEM JLC", ComponentHeight=6.5mm, Component Type=Standard, CreateDate=09.04.2008, Family=Jumper, HelpURL=\\cern.ch\dfs\Applications\Altium\Datasheets\COMATEL_313.1730.0.00.40.0.pdf, LatestRevisionDate=27.08.2013, Mounted=Yes, Part Description="Closed Insulated Black Jumper Pitch 2.54mm", Part Number=COMATEL_313.1730.0.00.40.0, Pin Count=1, PressFit=No, SCEM=09.55.10.960.9, Sense=No, SMD=No, Socket=No, Status=Obsolete
SW5: library part SW_TYCO_1-1571983-0, "8 Ways SPST DIP Switch", Manufacturer=TYCO, Manufacturer Part Number="1-1571983-0 or GDH08S04", Author="CERN DEM JLC", ComponentHeight=2.31mm, Component Type=Standard, CreateDate=08.01.2009, Family=Switch, HelpURL=\\cern.ch\dfs\Applications\Altium\Datasheets\SW_TYCO_1-1571983-0.pdf, LatestRevisionDate=08.01.2009, Mounted=Yes, PackageDescription="Pitch 1.27mm,  Body 11.28x6.2mm, 8 Ways SPST Surface-Mount DIP Switch,TYCO GDH Serie", Part Description="8 Way SPST SMD DIP Switch, Latched, Contact Rating 0.025A 24VDC", Part Number=SW_TYCO_1-1571983-0, Pin Count=16, PressFit=No, Sense=No, SMD=Yes, Socket=No, Status=None
W1: library part COMATEL_385.0358.1.02.400, "2 Mini Wire-Wrap Contact Strip Header", Manufacturer="KONTEK COMATEL", Manufacturer Part Number=385.0358.1.02.400, Author="CERN DEM JLC", ComponentHeight=8mm, Component Type=Standard, CreateDate=30.06.2010, Family="Test Point", HelpURL=\\cern.ch\dfs\Applications\Altium\Datasheets\COMATEL_385.0358.1.02.400.pdf, LatestRevisionDate=10.10.2012, Mounted=Yes, Part Description="2 Contacts Straight Strip Header Pitch 2.54mm L=6.3mm ''Mini-Wire-Wrap''", Part Number=COMATEL_385.0358.1.02.400, Pin Count=2, PressFit=No, Sense=No, SMD=No, Socket=No, Status="Not recommended"

## Free pads (board coordinates)
  round 6 hole 3.2: 0(58.4,7.6) 1(58.4,92.6) 2(28.4,92.6) 3(28.4,7.6)
  round 1.27 hole 2.794: 1(3.556,94.412) 2(3.556,5.512)

## Via types
v1: diameter 0.5, hole 0.2, Top to Bot, tented both sides, 139 vias
v2: diameter 0.6, hole 0.3, Top to Bot, tented both sides, 3 vias

## Nets (pads, with @x,y where several pads share a name; then routed paths per layer and width w, separated by ;. In a path a pad name is that pad's centre, name@x,y a point inside that pad or via, vN(x,y) a via of type N, cw(c..) or ccw(c..) an arc to the next point about the centre after c; other vN are vias at no path point)
D1: D6.1 IC21.35 J12.31 | length 62.2
  Top w0.127: J12.31@6.705,73.838 5.435,72.568 3.556,72.568 3.175,72.187 3.175,70.612 3.734,70.053 7.497,70.053 8.443,71 11.55,71 ; v1(11.55,72.235) 11.55,71 ; D6.1@11.96,71 11.55,71 ; IC21.35@50.44,74.259 51.098,74.259 v1(51.628,74.788)
  Bot w0.127: v1(11.55,72.235) 18.017,78.702 44.92,78.702 47.904,75.717 50.05,75.717 50.973,74.794 51.622,74.794 v1(51.628,74.788)
D2: D6.3 IC21.32 J12.28 | length 77.7
  Top w0.127: J12.28@4.165,68.758 5.207,69.799 7.982,69.799 8.182,70 D6.3@11.96,70 ; IC21.32@50.44,72.759 50.452,72.771 51.676,72.771 51.862,72.957 52.227,72.957 52.426,72.759 53.125,72.759 v1(53.391,73.025)
  Bot w0.127: J12.28@4.165,68.758 3.175,69.748 3.175,77.013 5.893,79.731 52.476,79.731 53.391,78.816 v1(53.391,73.025)
D3: D2.1 IC21.28 J12.25 | length 87.1
  Top w0.127: v1(10.338,64.008) 10.346,64 D2.1@11.96,64 ; IC21.28@50.44,70.759 52.268,70.759 v1(52.273,70.764)
  Bot w0.127: v1(10.338,64.008) 8.915,64.008 J12.25@6.705,66.218 5.689,65.202 3.556,65.202 2.921,65.837 2.921,79.019 4.378,80.476 53.026,80.476 53.848,79.654 53.848,72.339 v1(52.273,70.764)
D4: D2.3 IC21.25 J12.22 | length 63.5
  Top w0.127: J12.22@4.165,61.138 5.105,61.138 6.375,62.408 11.244,62.408 11.836,63 D2.3@11.96,63 ; v1(47.092,61.29) 50.885,65.083 50.885,67.95 50.627,68.208 50.451,68.208 50.267,68.392 50.267,69.259 IC21.25@50.44,69.259
  Bot w0.127: J12.22@4.165,61.138 5.156,60.147 20.371,60.147 21.006,60.782 23.114,60.782 23.8,60.096 46.736,60.096 47.092,60.452 v1(47.092,61.29)
D5: D7.1 IC24.35 J12.19 | length 80.2
  Top w0.127: J12.19@6.705,58.598 5.715,57.607 3.886,57.607 3.175,56.896 3.175,54.991 3.378,54.788 9.198,54.788 10.16,55.75 D7.1@11.96,55.75 ; IC24.35@47.189,28.285 48.681,28.285 v1(48.692,28.296)
  Bot w0.127: J12.19@6.705,58.598 5.715,57.607 4.293,57.607 3.175,56.49 3.175,55.372 3.48,55.067 7.722,55.067 35.738,27.051 47.447,27.051 v1(48.692,28.296)
D6: D7.3 IC24.32 J12.16 | length 66.8
  Top w0.127: J12.16@4.165,53.518 5.156,54.508 11.836,54.508 11.836,54.75 D7.3@11.96,54.75 ; IC24.32@47.189,26.785 48.908,26.785 v1(48.92,26.797)
  Bot w0.127: J12.16@4.165,53.518 5.156,54.508 7.874,54.508 35.585,26.797 v1(48.92,26.797)
D7: D4.1 IC24.28 J12.13 | length 67.5
  Top w0.127: J12.13@6.705,50.978 9.433,48.25 D4.1@11.71,48.25 ; IC24.28@47.189,24.785 48.443,24.785 v1(48.895,24.333)
  Bot w0.127: J12.13@6.705,50.978 10.338,47.345 10.338,40.157 28.564,21.931 41.608,21.931 41.66,21.984 46.021,21.984 46.626,22.589 47.151,22.589 v1(48.895,24.333)
D8: D4.3 IC24.25 J12.10 | length 81.5
  Top w0.127: D4.3@11.71,47.25 11.582,47.25 11.582,46.801 9.493,46.801 9.335,46.96 5.227,46.96 J12.10@4.165,45.898 3.175,44.907 3.175,31.09 4.216,30.048 4.216,22.86 6.071,21.006 34.468,21.006 36.932,18.542 45.822,18.542 47.498,20.218 47.498,23.285 IC24.25@47.189,23.285
DIR_CTRL1: IC21.1 IC21.40 R89.2 R90.1 SW5.1 | length 73.3
  Top w0.127: R89.2@15.8,80 15.8,73.1 28.448,60.452 ; R90.1@26.47,57.75 27.487,57.695 SW5.1@28.448,57.695 ; SW5.1@28.45,57.695 SW5.1@28.448,57.695 ; IC21.1@43.54,74.759 43.51,74.759 43.51,78.334 44.196,79.019 ; v1(45.884,79.019) 44.196,79.019 ; IC21.40@48.24,75.459 48.24,76.124 48.438,76.322 v1(48.438,76.466) ; SW5.1@28.448,57.695 28.448,60.452 ; 28.448,60.452 28.448,76.479 30.988,79.019 44.196,79.019
  Bot w0.127: v1(45.884,79.019) v1(48.438,76.466)
DIR_CTRL2: IC21.5 IC21.42 R91.2 R92.1 SW5.2 | length 70.3
  Top w0.127: R91.2@15.8,81.408 15.621,81.229 15.529,81.229 15.16,80.86 15.16,79.421 15.546,79.035 15.546,66.217 25.049,56.713 25.049,56.111 25.179,55.982 26.47,55.982 R92.1@26.47,56.5 27.407,56.5 27.482,56.425 SW5.2@28.45,56.425 29.416,56.425 29.416,71.427 30.48,72.492 42.596,72.492 42.863,72.759 IC21.5@43.54,72.759 44.306,72.759 44.699,73.152 44.699,73.677 44.695,73.681 44.695,74.184 44.699,74.188 44.815,74.304 46.91,74.304 47.24,74.633 IC21.42@47.24,75.459
DIR_CTRL3: IC21.8 IC21.19 R93.2 R94.1 SW5.3 | length 87.8
  Top w0.127: R93.2@15.8,83 16.123,82.677 16.434,82.677 16.891,82.22 16.891,79.872 16.054,79.035 16.054,73.205 24.057,65.202 v1(24.409,65.202) ; R94.1@26.47,55.25 27.407,55.25 27.502,55.155 SW5.3@28.45,55.155 29.67,55.155 29.67,68.252 31.496,70.079 v1(40.208,70.079) 40.208,71.12 40.853,71.765 42.509,71.765 43.016,71.259 IC21.8@43.54,71.259 ; v1(43.612,65.202) 47.193,65.202 47.777,65.786 47.777,67.513 47.24,68.051 IC21.19@47.24,68.559
  Bot w0.127: v1(24.409,65.202) v1(43.612,65.202) 43.612,66.675 v1(40.208,70.079)
DIR_CTRL4: IC21.12 IC21.21 R95.2 R96.1 SW5.4 | length 114.1
  Top w0.127: R95.2@15.8,84.5 52.197,84.5 54.06,82.637 54.06,62.264 51.43,59.634 46.157,59.634 ; R96.1@26.47,54 27.381,54 27.496,53.885 SW5.4@28.45,53.885 30.48,53.885 32.071,55.476 32.071,60.292 36.499,64.719 40.488,64.719 41.656,63.551 ; IC21.12@43.54,69.259 43.561,69.259 43.561,68.58 41.656,66.675 41.656,63.551 ; IC21.21@48.24,68.559 48.24,64.719 45.847,62.326 45.847,59.944 46.157,59.634 ; 41.656,63.551 45.572,59.634 46.157,59.634
DIR_CTRL5: IC24.1 IC24.40 R98.1 R126.2 SW5.5 | length 142.7
  Top w0.127: R126.2@16.05,20.25 33.776,20.25 36.102,17.924 50.512,17.924 52.883,20.295 52.883,33.02 46.799,39.103 46.799,53.149 37.643,62.306 35.077,62.306 34.442,61.671 34.442,49.389 ; R98.1@26.47,52.75 27.381,52.75 27.516,52.615 SW5.5@28.45,52.615 31.217,52.615 34.442,49.389 ; IC24.1@40.259,28.785 IC24.1@40.284,28.785 ; v1(40.284,29.642) IC24.1@40.284,28.785 ; IC24.1@40.289,28.785 IC24.1@40.284,28.785 ; IC24.40@44.933,29.083 v1(44.933,30.124) ; IC24.40@44.989,29.485 v1@44.989,30.115 ; 34.442,49.389 34.442,37.313 40.259,31.496 40.276,29.642 IC24.1@40.284,28.785
  Bot w0.127: v1(40.284,29.642) 44.515,29.642 v1@44.989,30.115
DIR_CTRL6: IC24.5 IC24.42 R100.1 R128.2 SW5.6 | length 65.1
  Top w0.127: R128.2@16.05,21.75 32.672,21.75 37.465,26.543 ; R100.1@26.47,51.25 27.407,51.25 27.502,51.345 SW5.6@28.45,51.345 31.129,51.345 33.63,48.844 33.63,28.753 35.839,26.543 37.465,26.543 ; IC24.42@43.989,29.485 43.989,28.956 43.379,28.346 41.427,28.346 41.427,27.432 40.78,26.785 IC24.5@40.289,26.785 39.79,26.785 39.562,26.558 37.48,26.558 37.465,26.543
DIR_CTRL7: IC24.8 IC24.19 R102.1 R131.2 SW5.7 | length 74.9
  Top w0.127: R131.2@16.05,23.25 33.045,23.25 v1(33.443,23.647) 33.443,28.279 32.918,28.804 32.918,48.895 31.738,50.075 SW5.7@28.45,50.075 27.482,50.075 27.407,50 R102.1@26.47,50 ; v1(35.91,23.588) 35.91,21.241 38.038,19.113 43.269,19.113 44.45,20.295 44.45,21.615 43.989,22.077 IC24.19@43.989,22.585 ; v1(39.497,25.222) 39.497,25.272 39.51,25.285 IC24.8@40.289,25.285
  Bot w0.127: v1(33.443,23.647) 35.91,23.647 37.664,25.341 ; v1(35.91,23.588) 37.664,25.341 ; v1(39.497,25.222) 39.497,25.298 39.454,25.341 37.664,25.341
DIR_CTRL8: IC24.12 IC24.21 R104.1 R132.2 SW5.8 | length 71
  Top w0.127: R132.2@16.05,24.75 21.302,24.75 v1(26.47,29.918) ; v1@26.524,29.728 26.524,29.918 29.258,29.918 32.233,32.893 32.233,47.93 31.357,48.805 SW5.8@28.45,48.805 ; v1(37.211,25.629) 37.211,22.174 37.592,21.793 39.726,21.793 40.284,22.352 40.284,23.285 IC24.12@40.289,23.285 ; v1(44.247,23.52) 44.247,23.292 44.989,23.292 IC24.21@44.989,22.585
  Top w0.254: R104.1@26.47,48.75 28.395,48.75 SW5.8@28.45,48.805
  Bot w0.127: v1(26.47,29.918) 30.641,25.747 37.329,25.747 v1(37.211,25.629) ; v1@37.406,25.671 39.578,25.671 39.654,25.747 40.512,25.747 40.915,25.345 41.28,25.345 41.554,25.07 41.783,25.07 42.677,24.176 43.058,24.176 43.713,23.52 v1(44.247,23.52)